# Altium PCB PCB_bad_traced.PcbDoc (part 2 of 5)
Units mm, origin at the board's own origin, x right, y up, seen from the top; angles counter-clockwise.
Board outline 425 x 295 mm, 2 copper layers (Top Layer, Bottom Layer); 484 components, 419 nets, 1569 pads, 847 vias.
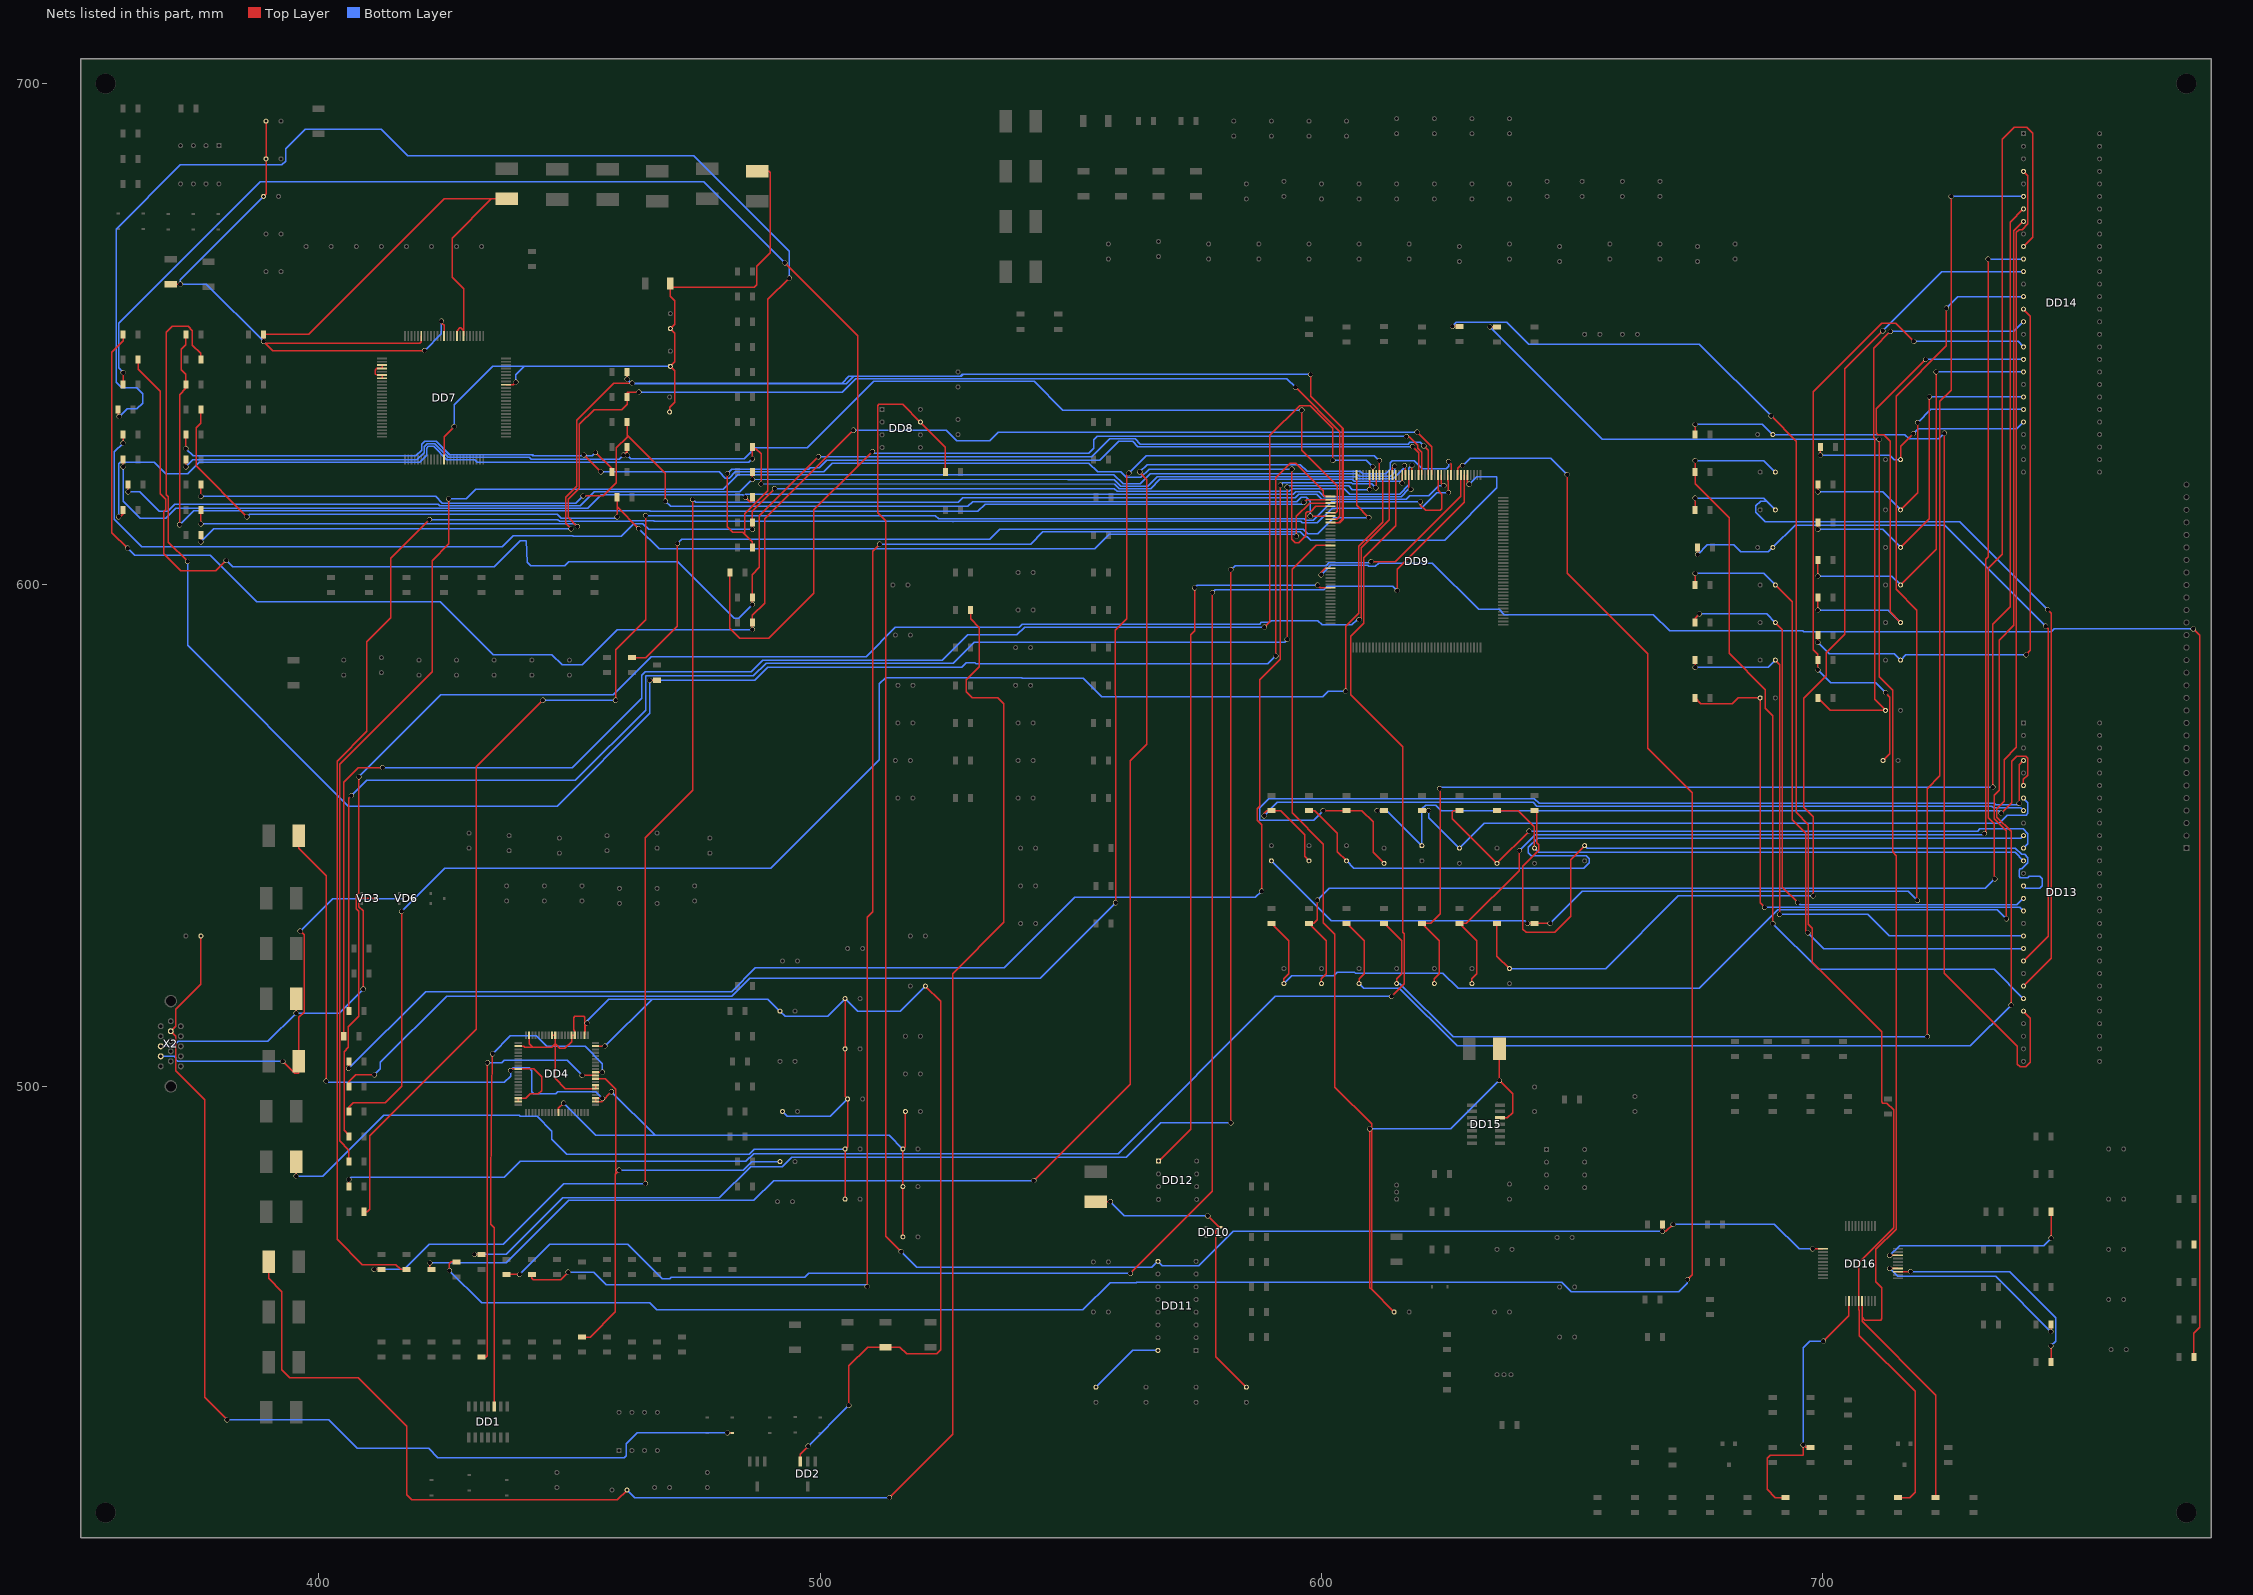
[diagram p2: the nets of this part, all layers, seen from the top]

## Via types
v1: diameter 1, hole 0.9, Top Layer to Bottom Layer, 847 vias

## Nets (pads, with @x,y where several pads share a name; then routed paths per layer and width w, separated by ;. In a path a pad name is that pad's centre, name@x,y a point inside that pad or via, vN(x,y) a via of type N, cw(c..) or ccw(c..) an arc to the next point about the centre after c; other vN are vias at no path point) (continued)
5V_VGA: C172.2 VD10.1 X2.9 | length 210.9
  Top Layer w0.25: C172.2@376.5,530 376.5,520.366 371.5,515.366 371.5,512 X2.9@370.5,511 371.5,510 371.5,503.123 377.241,497.383 377.241,438.023 v1(381.762,433.502) ; v1(481.533,430.911) 481.544,430.9 VD10.1@482.5,430.9
  Bottom Layer w0.25: v1(381.762,433.502) 401.98,433.502 407.695,427.787 421.945,427.787 423.748,425.983 460.959,425.983 461.34,426.364 461.34,428.701 463.55,430.911 v1(481.533,430.911)
5Va: C130.2 DD11.16 | length 15.4
  Bottom Layer w0.25: C130.2@555,440 562.34,447.34 DD11.16@567.38,447.34
5Vb: C128.1 DD10.5 L20.2 | length 61.9
  Top Layer w0.25: L20.2@555,477 v1(557.886,477) ; v1(577.317,474.193) 579.609,471.9 ; DD10.5@580,471.9 579.609,471.9 ; C128.1@585,440 578.871,446.129 578.871,471.162 579.609,471.9
  Bottom Layer w0.25: v1(557.886,477) 560.693,474.193 v1(577.317,474.193)
12MHZ: C158.1 DD9.16 DD15.12 L24.1 | length 245
  Top Layer w0.25: DD9.16@601.8,607.9 598.959,607.9 594.157,603.098 594.157,554.533 600.354,548.335 600.354,532.613 602.64,530.327 602.64,499.872 610.006,492.506 610.006,459.494 ; v1(609.625,491.515) 609.625,459.875 610.006,459.494 ; C158.1@614.5,455 610.006,459.494 ; L24.1@635.5,507.5 v1(635.5,501.201) 638.124,498.577 638.124,494.792 637.062,493.73 DD15.12@635.6,493.73
  Bottom Layer w0.25: v1(609.625,491.515) 625.815,491.515 v1(635.5,501.201)
9883_HS: DD4.30 R14.2 | length 82.7
  Top Layer w0.25: R14.2@432.5,446 433.351,446 433.629,446.278 v1(433.629,504.715) ; v1(452.552,502.183) 452.56,502.175 DD4.30@455.222,502.175
  Bottom Layer w0.25: v1(433.629,504.715) 436.551,504.715 437.045,505.21 449.526,505.21 v1(452.552,502.183)
9883_VS: DD1.10 DD4.31 | length 99.4
  Top Layer w0.25: v1(434.696,506.501) 434.611,506.416 434.325,481.869 434.325,472.509 435.04,471.793 DD1.10@435.04,436.2 ; DD4.31@455.222,502.825 v1(456.59,502.825)
  Bottom Layer w0.25: v1(434.696,506.501) 438.252,510.058 443.382,510.058 445.465,507.975 453.136,507.975 456.59,504.52 v1(456.59,502.825)
+3V3: C1.1 C2.1 C3.1 C4.1 DD4.11 DD4.22 DD4.23 DD4.69 DD4.78 DD4.79 L1.1 | length 246.4
  Top Layer w0.25: L1.1@396,550 396,547.458 401.472,541.985 v1(401.472,501.066) ; v1(438.277,503.149) 438.408,503.149 438.734,503.475 DD4.69@439.778,503.475 442.86,503.475 444.449,501.886 444.449,499.161 443.84,498.551 442.226,498.551 441.3,497.625 DD4.78@439.778,497.625 DD4.79@439.778,496.975 ; DD4.11@447.825,494.778 447.825,495.625 v1(448.843,496.644) ; v1(456.579,497.625) DD4.23@455.222,497.625 DD4.22@455.222,496.975 456.437,496.975 v1(458.394,498.932) ; C1.1@516.5,470 C2.1@516.5,480 C3.1@516.5,487.5 517,488 C4.1@517,495
  Bottom Layer w0.25: v1(401.472,501.066) 401.736,500.802 437.023,500.802 438.277,502.056 v1(438.277,503.149) 438.826,503.697 441.96,503.697 442.534,503.123 442.534,498.901 442.907,498.529 447.275,498.529 447.665,498.918 455.285,498.918 v1(456.579,497.625) ; v1(448.843,496.644) 455.242,490.245 467.081,490.245 ; v1(458.394,498.932) 467.081,490.245 ; C3.1@516.5,487.5 513.755,490.245 467.081,490.245
A3_3V: C57.1 C58.2 C59.2 C60.2 DD7.82 DD7.84 DD7.88 DD7.95 L18.2 R59.1 | length 234.5
  Top Layer w0.25: C57.1@370.5,660 v1(372.415,660) ; R59.1@389,650 R59.1@389,649.986 ; C58.2@389,677.5 389.5,678 C59.2@389.5,685 C60.2@389.5,692.5 ; DD7.95@420.45,649.7 420.45,648.462 420.196,648.208 389.365,648.208 ; v1(421.107,646.76) 390.813,646.76 389.365,648.208 ; v1(424.492,652.632) 424.18,652.632 424.492,652.32 424.492,652.124 424.688,652.124 425,651.812 DD7.88@425,649.7 ; DD7.84@427.6,649.7 427.6,650.748 428.184,651.332 428.316,651.332 428.9,650.748 ; DD7.82@428.9,649.7 428.9,650.748 ; L18.2@437.5,677 434.43,677 ; R59.1@389,649.986 v1(389,648.573) 389.365,648.208 ; R59.1@389,649.986 398.069,649.986 425.083,677 434.43,677 ; 428.9,650.748 428.9,659.109 426.618,661.391 426.618,669.188 434.43,677
  Bottom Layer w0.25: v1(389,648.573) 377.573,660 v1(372.415,660) 372.415,660.915 C58.2@389,677.5 ; v1(421.107,646.76) 424.492,650.146 v1(424.492,652.632)
A3V3: C12.1 C14.1 C26.1 C28.1 C30.1 C31.1 C32.1 C33.1 C34.1 DD2.3 DD4.26 DD4.27 DD4.39 DD4.42 DD4.45 DD4.46 DD4.51 DD4.52 DD4.59 DD4.62 L7.1 | length 433.3
  Top Layer w0.25: L7.1@395.5,485 395.5,482.121 v1(395.503,482.117) ; DD4.62@439.778,508.025 440.895,508.025 441.09,507.83 442.653,507.83 ; DD4.59@441.975,510.222 441.975,508.508 442.653,507.83 ; DD4.52@446.525,510.222 DD4.51@447.175,510.222 447.175,508.473 ; v1(453.533,512.596) 453.303,512.596 DD4.42@453.025,510.222 453.025,513.831 452.872,513.984 451.104,513.984 450.825,513.705 450.825,511.277 451.075,511.026 DD4.45@451.075,510.222 DD4.46@450.425,510.222 450.425,508.935 449.072,507.582 448.056,507.592 447.175,508.473 ; DD4.27@455.222,500.225 DD4.26@455.222,499.575 449.224,499.575 447.175,501.624 447.175,508.473 ; DD4.39@455.222,508.025 v1(457.098,508.025) ; DD2.3@496,425.175 496,426.633 v1(497.611,428.244) ; C34.1@505,477.5 C33.1@505,487.5 505.5,488 C32.1@505.5,497.5 505,498 C31.1@505,507.5 C30.1@505,517.5 ; v1(505.765,436.397) 505.765,444.241 509.524,448 C14.1@513,448 515.874,448 517.24,446.634 523.24,446.634 524.053,447.446 524.053,516.947 C12.1@521,520 ; 442.653,507.83 446.532,507.83 447.175,508.473
  Bottom Layer w0.25: v1(395.503,482.117) 400.839,482.117 412.973,494.251 439.98,494.251 440.234,493.997 443.543,493.997 446.449,491.091 446.449,489.5 449.437,486.512 485.877,486.512 486.865,487.5 C33.1@505,487.5 ; v1(453.533,512.596) 453.533,513.104 457.853,517.423 466.497,517.423 ; v1(457.098,508.025) 466.497,517.423 ; C26.1@492.5,495 493.495,494.005 502.005,494.005 C32.1@505.5,497.5 ; v1(497.611,428.244) v1(505.765,436.397) ; C12.1@521,520 516.01,515.01 507.49,515.01 C30.1@505,517.5 501.494,513.994 493.006,513.994 C28.1@492,515 489.577,517.423 466.497,517.423
ADC1: DD16.34 R222.2 | length 40.4
  Top Layer w0.25: v1(713.334,463.702) 713.336,463.7 DD16.34@714.95,463.7 ; v1(745.49,451.089) 745.5,451.099 R222.2@745.5,452.5
  Bottom Layer w0.25: v1(713.334,463.702) 714.908,462.128 734.451,462.128 v1(745.49,451.089)
ADC2: DD16.33 R224.2 | length 44.5
  Top Layer w0.25: DD16.33@714.95,463.05 v1(717.499,463.05) ; v1(745.49,448.259) 745.5,448.249 R224.2@745.5,445
  Bottom Layer w0.25: v1(717.499,463.05) 737.252,463.05 746.404,453.898 746.404,449.174 v1(745.49,448.259)
ASIC_H: C39.1 L9.2 R108.2 | length 358.4
  Top Layer w0.25: L9.2@390,465 390,461.713 392.684,459.029 392.684,443.445 394.208,441.921 407.912,441.921 417.576,432.257 417.576,418.541 418.592,417.525 459.525,417.525 C39.1@461.5,419.5 ; v1(513.842,418.008) 526.415,430.581 526.415,522.453 536.677,532.714 536.677,576.275 535.432,577.52 530.352,577.52 529.175,578.697 529.175,581.127 531.749,583.701 531.749,591.515 530,593.264 R108.2@530,595
  Bottom Layer w0.25: C39.1@461.5,419.5 462.992,418.008 v1(513.842,418.008)
ASIC_RESET: DD8.7 DD11.9 DD16.11 R118.2 R182.1 | length 385.7
  Top Layer w0.25: v1(516.179,467.03) 513.055,470.154 513.055,612.851 511.48,614.426 511.48,635.762 511.734,636.016 516.484,636.016 DD8.7@520,632.5 525,627.5 R118.2@525,622.5 ; v1(668,471.073) R182.1@668,472.5 ; v1@668.005,471.068 668.706,471.068 v1(670.128,472.491) ; v1(697.941,467.6) DD16.11@700,467.6
  Bottom Layer w0.25: v1(516.179,467.03) 519.278,463.931 566.191,463.931 DD11.9@567.38,465.12 568.259,464.241 575.569,464.241 582.401,471.073 v1(668,471.073) v1@668.005,471.068 ; v1(670.128,472.491) 690.347,472.491 695.237,467.6 v1(697.941,467.6)
ASIC_SCL: DD16.26 R114.2 R221.2 | length 317
  Top Layer w0.25: v1(633.578,651.5) R114.2@635,651.5 ; DD16.26@707.8,457.2 707.8,453.974 ; v1(711.2,629.056) 711.2,581.687 713.883,579.004 713.883,546.795 714.629,546.049 714.629,471.551 710.565,467.487 710.565,461.066 711.787,459.844 711.787,453.644 711.532,453.389 708.386,453.389 707.8,453.974 ; R221.2@722.5,418 722.5,438.443 707.8,453.143 707.8,453.974
  Bottom Layer w0.25: v1(633.578,651.5) 655.97,629.107 711.149,629.107 v1(711.2,629.056)
ASIC_SDA: DD16.25 R115.2 R219.2 | length 309.7
  Top Layer w0.25: v1(626.085,651.586) 626.091,651.58 R115.2@627.5,651.58 ; v1(689.661,633.705) 694.665,628.701 694.665,554.634 697.112,552.187 697.112,532.305 697.906,531.51 697.906,524.723 711.708,510.921 711.708,496.926 711.962,496.672 712.779,496.672 714.125,495.325 714.125,471.834 707.15,464.859 DD16.25@707.15,457.2 707.15,455.498 707.288,455.36 707.288,450.317 718.388,439.217 718.388,419.092 717.296,418 R219.2@715,418
  Bottom Layer w0.25: v1(626.085,651.586) 626.897,652.399 636.949,652.399 641.343,648.005 675.361,648.005 v1(689.661,633.705)
AUDIO_EN: DD16.38 R215.2 | length 40.5
  Top Layer w0.25: v1(713.334,466.293) 713.34,466.3 DD16.38@714.95,466.3 ; v1(745.5,469.758) R215.2@745.5,475
  Bottom Layer w0.25: v1(713.334,466.293) 715.301,468.26 744.003,468.26 v1(745.5,469.758)
AUDIO_MUTE: DD16.22 R212.2 R233.1 | length 55.8
  Top Layer w0.25: R212.2@692.5,418 690.481,418 688.873,419.608 688.873,425.831 689.458,426.415 696.062,426.415 v1(696.062,428.498) 696.56,428 R233.1@697.5,428 ; v1(700.098,449.182) 705.2,454.285 DD16.22@705.2,457.2
  Bottom Layer w0.25: v1(696.062,428.498) 696.062,447.864 697.379,449.182 v1(700.098,449.182)
B_IN: L4.1 VD3.3 X2.3 | length 69.6
  Top Layer w0.25: v1(395.5,514.629) L4.1@395.5,517.5 ; v1(408.889,519.405) 408.889,535 408.025,535.864 408.025,537.413 408.112,537.5 VD3.3@411.25,537.5
  Bottom Layer w0.25: X2.3@368.5,508 370.992,508 371.983,508.991 389.861,508.991 v1(395.5,514.629) 404.114,514.629 v1(408.889,519.405)
B_INA0: DD9.147 R32.2 | length 337.7
  Top Layer w0.25: R32.2@406,480 v1(406,481.432) ; v1(613.969,517.931) 616.509,520.471 616.509,530.489 616.243,530.754 616.243,567.733 605.846,578.131 605.846,589.742 608.432,592.328 608.432,605.447 614.8,611.816 DD9.147@614.8,621.95
  Bottom Layer w0.25: v1(406,481.432) 406.447,481.879 437.048,481.879 440.207,485.038 485.19,485.038 486.765,486.613 559.46,486.613 590.779,517.931 v1(613.969,517.931)
B_INA1: DD9.148 R31.2 | length 338
  Top Layer w0.25: R31.2@406,485 406,487.299 404.165,489.134 404.165,564.261 422.631,582.727 422.631,604.876 425.933,608.178 v1(425.933,617.195) ; DD9.148@614.15,621.95 614.15,623.294 v1(614.578,623.722)
  Bottom Layer w0.25: v1(425.933,617.195) 429.471,617.195 431.376,619.1 480.67,619.1 483.591,622.021 558.597,622.021 560.426,620.192 563.88,620.192 565.865,622.177 607.056,622.177 607.56,621.673 613.816,621.673 614.578,622.435 v1(614.578,623.722)
B_INA2: DD9.149 R30.2 | length 318.3
  Top Layer w0.25: R30.2@406,490 406,490.296 405.054,491.242 405.054,506.933 405.917,507.797 405.917,511.937 408,514.02 408,534.916 407.521,535.395 407.521,538.074 408,538.554 v1(408,561.721) ; v1(607.517,593.09) 607.924,593.496 607.924,607.441 613.5,613.017 DD9.149@613.5,621.95
  Bottom Layer w0.25: v1(408,561.721) 424.383,578.104 458.724,578.104 466.344,585.724 509.161,585.724 514.992,591.555 539.729,591.555 540.35,592.176 587.68,592.176 588.032,592.528 589.592,592.528 589.948,592.883 599.288,592.883 600.148,592.023 606.061,592.023 607.129,593.09 v1(607.517,593.09)
B_INA3: DD9.151 R29.2 | length 312.7
  Top Layer w0.25: R29.2@406,495 406,495.865 406.908,496.773 413.258,496.773 416.535,500.05 v1(416.535,534.899) ; v1(604.825,578.841) 604.825,591.769 607.416,594.36 607.416,607.762 612.2,612.546 DD9.151@612.2,621.95
  Bottom Layer w0.25: v1(416.535,534.899) 425.094,543.458 490.144,543.458 511.835,565.15 511.835,580.263 513.08,581.508 540.182,581.508 540.334,581.355 552.485,581.355 556.158,577.682 600.212,577.682 601.37,578.841 v1(604.825,578.841)
B_INA4: DD9.152 R28.2 | length 310.9
  Top Layer w0.25: R28.2@406,500 406,500.894 407.416,502.31 v1(411.099,502.31) ; v1(558.952,536.626) 558.952,577.952 558.839,578.065 558.839,590.945 561.111,593.217 561.111,621.843 v1(561.594,622.325) ; DD9.152@611.55,621.95 v1(611.55,624.795)
  Bottom Layer w0.25: v1(411.099,502.31) 412.328,503.54 412.328,504.844 425.495,518.011 482.426,518.011 485.978,521.564 543.89,521.564 v1(558.952,536.626) ; v1(561.594,622.325) 565.048,625.78 610.565,625.78 v1(611.55,624.795)
B_INA5: DD9.153 R27.2 | length 303.7
  Top Layer w0.25: v1(405.994,503.58) 406,503.587 R27.2@406,505 ; v1(588.061,538.937) 588.061,552.221 587.186,553.096 587.186,555.346 587.68,555.84 587.68,581.101 591.795,585.216 v1(591.795,619.938) ; v1(610.827,619.371) 610.9,619.445 DD9.153@610.9,621.95
  Bottom Layer w0.25: v1(405.994,503.58) 421.335,518.922 482.422,518.922 487.117,523.617 536.698,523.617 550.774,537.693 586.816,537.693 v1(588.061,538.937) ; v1(591.795,619.938) 592.277,620.42 605.968,620.42 606.227,620.161 610.037,620.161 v1(610.827,619.371)
B_INA6: DD9.154 R26.2 | length 321.9
  Top Layer w0.25: R26.2@405,510 405,560.651 407.924,563.575 v1(412.75,563.575) ; v1(588.62,591.591) 589.694,592.666 589.694,629.816 595.63,635.752 597.723,635.752 602.259,631.215 v1(602.259,624.872) ; DD9.154@610.25,621.95 v1(610.25,623.57)
  Bottom Layer w0.25: v1(412.75,563.575) 450.621,563.575 464.482,577.436 464.482,582.044 465.139,582.701 486.283,582.701 488.569,584.987 524.332,584.987 529.401,590.056 539.238,590.056 540.774,591.591 v1(588.62,591.591) ; v1(602.259,624.872) 608.948,624.872 v1(610.25,623.57)
B_INA7: DD9.155 R25.2 | length 296.9
  Top Layer w0.25: R25.2@406,515 406,557.511 v1(406.502,558.013) ; v1(593.166,589.153) v1(593.166,619.531) ; v1(609.6,619.023) DD9.155@609.6,621.95
  Bottom Layer w0.25: v1(406.502,558.013) 409.575,561.086 451.206,561.086 465.186,575.066 465.186,581.863 465.211,581.889 486.715,581.889 489.255,584.429 526.593,584.429 530.784,588.62 592.633,588.62 v1(593.166,589.153) ; v1(593.166,619.531) 593.42,619.785 605.411,619.785 606.173,619.023 v1(609.6,619.023)
B_INB0: DD9.1 R73.2 R97.2 | length 375.7
  Top Layer w0.25: v1(373.863,604.723) 370.041,608.545 370.041,617.574 369.621,617.993 369.621,650.367 370.84,651.586 373.99,651.586 374.828,650.748 374.828,647.848 376.5,646.176 R73.2@376.5,645 ; v1(466.065,581) R97.2@467.5,581 ; v1(590.906,585.876) 590.906,621.411 593.725,624.23 594.868,624.23 600.316,618.783 600.316,617.982 600.648,617.65 DD9.1@601.8,617.65
  Bottom Layer w0.25: v1(373.863,604.723) 373.863,587.961 405.905,555.918 447.612,555.918 466.065,574.37 v1(466.065,581) 486.969,581 489.61,583.641 528.24,583.641 529.121,584.522 530.879,584.522 531.109,584.292 589.321,584.292 v1(590.906,585.876)
B_INB1: DD9.2 R72.2 R96.2 | length 270.9
  Top Layer w0.25: v1(372.288,612.013) 372.288,637.979 373.5,639.191 R72.2@373.5,640 373.5,642.01 372.567,642.943 372.567,647.014 373.5,647.947 R96.2@373.5,650 ; v1(596.468,616.458) 597.01,617 DD9.2@601.8,617
  Bottom Layer w0.25: v1(372.288,612.013) 375.057,614.783 466.009,614.783 466.105,614.686 531.438,614.686 532.896,616.144 596.154,616.144 v1(596.468,616.458)
B_INB2: DD9.3 R71.2 R95.2 | length 256.6
  Top Layer w0.25: R71.2@376.5,635 376.5,632.303 375.539,631.342 375.539,623.748 v1(385.699,613.588) ; R95.2@459.5,617.5 459.5,615.569 ; v1(459.511,613.588) 459.5,613.599 459.5,615.569 ; v1(463.818,611.251) 459.5,615.569 ; v1(594.995,609.727) 594.995,613.736 597.609,616.35 DD9.3@601.8,616.35
  Bottom Layer w0.25: v1(385.699,613.588) 386.214,614.102 447.611,614.102 448.408,613.305 459.228,613.305 v1(459.511,613.588) ; v1(463.818,611.251) 467.882,607.187 554.787,607.187 557.679,610.079 594.643,610.079 v1(594.995,609.727)
B_INB3: DD9.4 R70.2 R94.2 | length 272.2
  Top Layer w0.25: v1(373.5,627.19) R70.2@373.5,630 ; v1(452.882,625.958) v1(456.303,622.536) ; v1(455.198,626.466) 458.5,623.164 R94.2@458.5,622.5 ; v1(594.116,623.113) 594.116,609.092 594.743,608.465 595.511,608.465 596.878,609.833 596.878,614.353 597.154,614.629 597.814,614.629 598.885,615.7 DD9.4@601.8,615.7
  Bottom Layer w0.25: v1(373.5,627.19) 374.961,625.729 419.397,625.729 420.54,626.872 420.54,628.049 421.132,628.641 423.4,628.641 ; v1(452.882,625.958) v1@452.703,625.779 ; v1(455.198,626.466) 454.511,625.779 v1@452.703,625.779 ; v1(456.303,622.536) 479.892,622.536 481.109,621.319 481.882,621.319 483.099,622.536 500.7,622.536 502.42,624.256 553.618,624.256 555.338,622.536 559.971,622.536 561.061,621.446 563.984,621.446 565.651,623.113 v1(594.116,623.113) ; 423.4,628.641 426.084,625.957 426.147,625.957 ; 423.4,628.641 423.463,628.641 426.147,625.957 ; 426.147,625.957 442.521,625.957 ; 442.521,625.957 442.699,625.779 442.877,625.779 ; 442.521,625.957 442.699,625.957 442.877,625.779 ; 442.877,625.779 v1@452.703,625.779
B_INB4: DD9.6 R69.2 R93.2 | length 263.7
  Top Layer w0.25: v1(373.5,623.57) R69.2@373.5,625 ; v1(460.756,625.907) 461.5,626.651 ; v1(461.5,625.907) 461.5,626.651 ; R93.2@461.5,627.5 461.5,626.651 ; v1(596.062,634.873) 596.062,626.847 603.148,619.76 603.148,614.68 602.868,614.4 DD9.6@601.8,614.4
  Bottom Layer w0.25: v1(373.5,623.57) 374.897,624.967 419.608,624.967 421.044,626.403 421.044,627.541 421.64,628.137 423.164,628.137 425.848,625.453 442.017,625.453 442.392,625.079 459.928,625.079 v1(460.756,625.907) ; v1(461.5,625.907) 462.211,625.196 484.886,625.196 487.02,627.329 497.408,627.329 510.667,640.588 542.694,640.588 548.409,634.873 v1(596.062,634.873)
B_INB5: DD9.7 R68.2 R92.2 | length 253.9
  Top Layer w0.25: v1(376.5,617.652) R68.2@376.5,620 ; v1(452.745,617.753) 456.717,617.753 459.334,620.37 459.334,627.322 461.5,629.488 461.5,629.913 ; R92.2@461.5,632.5 461.5,629.913 ; v1(469.138,616.737) 469.138,622.275 461.5,629.913 ; v1(597.757,613.75) DD9.7@601.8,613.75
  Bottom Layer w0.25: v1(376.5,617.652) 423.301,617.652 424.637,616.316 451.307,616.316 v1(452.745,617.753) ; v1(469.138,616.737) 470.179,615.696 529.488,615.696 530.44,616.648 595.065,616.648 595.964,617.547 596.923,617.547 597.757,616.712 v1(597.757,613.75)
B_INB6: DD9.8 R67.2 R91.2 | length 280.5
  Top Layer w0.25: v1(376.5,612.165) R67.2@376.5,615 ; v1(451.587,611.632) 449.757,613.462 449.757,617.117 451.968,619.328 451.968,632.028 454.914,634.975 460.459,634.975 461.5,636.016 R91.2@461.5,637.5 461.5,638.454 v1(463.88,638.454) ; v1(594.817,639.42) 603.656,630.58 603.656,613.664 603.092,613.1 DD9.8@601.8,613.1
  Bottom Layer w0.25: v1(376.5,612.165) 451.053,612.165 v1(451.587,611.632) ; v1(463.88,638.454) 504.444,638.454 507.107,641.117 593.12,641.117 v1(594.817,639.42)
B_INB7: DD9.9 R66.2 R90.2 | length 351.4
  Top Layer w0.25: R66.2@376.5,610 376.5,608.588 v1(376.504,608.584) ; v1(450.367,611.2) 449.247,612.321 449.247,617.471 451.46,619.683 451.46,632.866 458.851,640.258 v1(462.509,640.258) ; v1(461.5,641.073) R90.2@461.5,642.5 ; v1(597.84,642.01) 597.84,637.667 604.164,631.342 ; DD9.9@601.8,612.45 603.458,612.45 ; 603.458,612.45 604.164,613.156 604.164,631.342 ; 603.458,612.45 603.611,612.45 604.317,613.156 604.317,631.19 604.164,631.342
  Bottom Layer w0.25: v1(376.504,608.584) 379.12,611.2 v1(450.367,611.2) ; v1(461.5,641.073) 462.417,640.156 505.206,640.156 506.671,641.621 ; v1(462.509,640.258) 504.402,640.258 505.765,641.621 506.671,641.621 ; v1(597.84,642.01) 528.557,642.01 ; 506.671,641.621 527.981,641.621 ; 527.981,641.621 528.371,642.01 528.557,642.01 ; 527.981,641.621 528.168,641.621 528.557,642.01
BA0: C117.2 DD14.16 R136.1 | length 119.8
  Top Layer w0.25: R136.1@699,577.5 701.5,575 C117.2@712.5,575 710.311,577.189 710.311,629.287 710.096,629.502 710.096,647.231 v1(713.447,650.582)
  Bottom Layer w0.25: v1(713.447,650.582) 738.082,650.582 DD14.16@740,652.5
BA1: C114.2 DD14.18 R135.1 | length 135.1
  Top Layer w0.25: v1(699.008,583.057) 699,583.065 R135.1@699,585 699,586.181 698.119,587.062 698.119,638.531 711.759,652.17 714.578,652.17 v1(718.16,648.589) ; C114.2@712,565 713.379,566.379 713.379,577.627 v1(712.495,578.51)
  Bottom Layer w0.25: v1(699.008,583.057) 701.599,580.466 710.54,580.466 v1(712.495,578.51) ; v1(718.16,648.589) 738.911,648.589 DD14.18@740,647.5
BA2: C111.2 DD14.15 R134.1 | length 114.8
  Top Layer w0.25: v1(699,588.569) R134.1@699,590 ; DD14.15@740,655 741.401,653.599 741.401,586.943 v1(740.512,586.054)
  Bottom Layer w0.25: v1(699,588.569) 701.311,586.257 714.243,586.257 C111.2@715.5,585 716.554,586.054 v1(740.512,586.054)
BA3: C108.2 DD14.19 R133.1 | length 98.9
  Top Layer w0.25: v1(699,594.995) R133.1@699,597.5 ; C108.2@715.5,592.5 713.384,594.616 713.384,628.701 712.089,629.996 710.946,629.996 710.6,630.342 710.6,635.121 v1(720.479,645)
  Bottom Layer w0.25: v1(699,594.995) 713.005,594.995 C108.2@715.5,592.5 ; v1(720.479,645) DD14.19@740,645
BA4: C105.2 DD14.20 R132.1 | length 83.3
  Top Layer w0.25: v1(699,601.777) R132.1@699,605 ; C105.2@715.5,600 722.579,607.079 v1(722.579,642.5)
  Bottom Layer w0.25: v1(699,601.777) 713.723,601.777 C105.2@715.5,600 ; v1(722.579,642.5) DD14.20@740,642.5
BA5: C102.2 DD14.22 R131.1 | length 70.5
  Top Layer w0.25: v1(699,611.073) R131.1@699,612.5 ; C102.2@715.5,607.5 721.258,613.258 v1(721.258,637.5)
  Bottom Layer w0.25: v1(699,611.073) 711.927,611.073 C102.2@715.5,607.5 ; v1(721.258,637.5) DD14.22@740,637.5
BA6: C99.2 DD14.23 R128.1 | length 60.4
  Top Layer w0.25: v1(699,618.566) R128.1@699,620 ; C99.2@715.5,615 718.912,618.412 v1(718.912,632.399)
  Bottom Layer w0.25: v1(699,618.566) 711.934,618.566 C99.2@715.5,615 ; v1(718.912,632.399) 721.512,635 DD14.23@740,635
BA7: C95.2 DD14.24 R127.1 | length 47.1
  Top Layer w0.25: v1(699.5,625.879) R127.1@699.5,627.5 ; C95.2@715.5,625 715.5,627.641 v1(718.033,630.174)
  Bottom Layer w0.25: v1(699.5,625.879) 713.334,625.879 714.213,625 C95.2@715.5,625 ; v1(718.033,630.174) 719.049,631.19 738.69,631.19 DD14.24@740,632.5
BB0: C91.2 DD13.16 R126.1 | length 108
  Top Layer w0.25: R126.1@674.5,577.5 675.649,576.351 681.939,576.351 683.088,577.5 C91.2@687.5,577.5 687.5,536.577 v1(688.377,535.699)
  Bottom Layer w0.25: v1(688.377,535.699) 739.301,535.699 DD13.16@740,535
BB1: C86.2 DD13.18 R125.1 | length 119.5
  Top Layer w0.25: v1(674.497,583.565) 674.5,583.568 R125.1@674.5,585 ; C86.2@690.5,585 691.388,584.112 v1(691.388,534.314)
  Bottom Layer w0.25: v1(674.497,583.565) 689.065,583.565 C86.2@690.5,585 ; v1(691.388,534.314) 708.939,534.314 713.254,530 DD13.18@740,530
BB2: C82.2 DD13.15 R124.1 | length 121.4
  Top Layer w0.25: R124.1@674.5,592.5 674.5,593.37 v1(675.363,594.233) ; C82.2@690.5,592.5 691.896,591.104 691.896,539.75 v1(694.969,536.677)
  Bottom Layer w0.25: v1(675.363,594.233) 688.767,594.233 C82.2@690.5,592.5 ; v1(694.969,536.677) 695.443,536.203 738.703,536.203 DD13.15@740,537.5
BB3: C78.2 DD13.19 R123.1 | length 135.6
  Top Layer w0.25: R123.1@674.5,600 v1(674.5,602.31) ; C78.2@690.5,600 693.877,596.623 693.877,553.225 696.608,550.495 696.608,531.05 v1(697.027,530.631)
  Bottom Layer w0.25: v1(674.5,602.31) 688.19,602.31 C78.2@690.5,600 ; v1(697.027,530.631) 700.158,527.5 DD13.19@740,527.5
BB4: C76.2 DD13.20 R122.1 | length 151.9
  Top Layer w0.25: R122.1@675,607.5 675,606.074 v1(675.005,606.069) ; DD13.20@740,525 744.931,529.931 744.931,591.287 v1(744.423,591.795)
  Bottom Layer w0.25: v1(675.005,606.069) 676.961,608.025 682.193,608.025 683.616,606.603 689.103,606.603 C76.2@690,607.5 694.462,611.962 724.256,611.962 v1(744.423,591.795)
BB5: C74.2 DD13.22 R121.1 | length 167
  Top Layer w0.25: R121.1@674.5,615 v1(674.5,617.322) ; DD13.22@740,520 745.541,525.541 745.541,594.385 v1(744.83,595.097)
  Bottom Layer w0.25: v1(674.5,617.322) 688.178,617.322 688.788,616.712 ; C74.2@690.5,615 688.788,616.712 ; v1(744.83,595.097) 727.278,612.648 688.518,612.648 686.613,614.553 686.613,615.756 687.569,616.712 688.788,616.712
BB6: C72.2 DD13.23 R120.1 | length 171.9
  Top Layer w0.25: v1(674.5,624.815) R120.1@674.5,622.5 674.5,620.189 681.279,613.41 681.279,586.41 688.543,579.145 688.543,575.462 690.042,573.964 v1(690.042,532.46)
  Bottom Layer w0.25: v1(674.5,624.815) 688.185,624.815 C72.2@690.5,622.5 ; v1(690.042,532.46) 699.16,523.342 734.158,523.342 DD13.23@740,517.5
BB7: C70.2 DD13.24 R119.1 | length 199.3
  Top Layer w0.25: R119.1@674.5,630 v1(674.5,632.054) ; v1(724.23,630.301) 724.23,522.605 738.81,508.025 738.81,504.444 739.318,503.936 740.486,503.936 741.401,504.85 741.401,513.599 DD13.24@740,515
  Bottom Layer w0.25: v1(674.5,632.054) 687.946,632.054 C70.2@690,630 716.352,630 717.22,629.133 723.062,629.133 v1(724.23,630.301)
BL_ON_OFF: R206.2
COAST: C25.2 DD4.29 R18.2 | length 91.9
  Top Layer w0.25: R18.2@452.5,450 454.152,450 459.171,455.019 459.171,482.539 459.236,482.604 ; DD4.29@455.222,501.525 457.2,501.525 459.273,499.452 459.273,498.551 459.236,482.604 ; v1(459.918,483.286) 459.236,482.604
  Bottom Layer w0.25: v1(459.918,483.286) 484.672,483.286 486.386,485 C25.2@492,485
D3_3V: C42.1 C45.2 C47.2 C50.2 DD7.38 DD7.67 L13.2 | length 135.7
  Top Layer w0.25: DD7.38@425,625 425,629.576 v1(426.999,631.575) ; DD7.67@437.35,639.95 438.84,639.95 v1(439.348,640.458) ; C50.2@470,634.5 470,635.481 470.992,636.473 470.992,642.748 C47.2@470.12,643.62 471.018,644.518 471.018,650.222 C45.2@470.12,651.12 471.018,652.018 471.018,656.692 470.12,657.589 C42.1@470.12,659.359 ; C42.1@470.12,660.12 C42.1@470.12,659.359 ; L13.2@487.5,682.5 489.837,682.5 490.093,682.244 490.093,666.293 487.401,663.6 487.401,659.892 486.867,659.359 C42.1@470.12,659.359
  Bottom Layer w0.25: v1(426.999,631.575) 426.999,635.914 434.705,643.62 441.025,643.62 ; v1(439.348,640.458) 439.348,641.943 441.025,643.62 ; C47.2@470.12,643.62 441.025,643.62
D3_V3: DD7.3 DD7.4 DD7.6 DD7.7 | length 5
  Top Layer w0.25: DD7.7@412.65,641.25 DD7.6@412.65,641.9 411.48,641.9 411.302,642.078 411.302,642.874 411.628,643.2 DD7.4@412.65,643.2 DD7.3@412.65,643.85
DE_IN: DD9.159 R98.2 | length 178.4
  Top Layer w0.25: R98.2@462.5,585.5 465.226,585.5 471.526,591.799 v1(471.526,608.279) ; DD9.159@607,621.95 607,615.883 v1(609.448,613.435)
  Bottom Layer w0.25: v1(471.526,608.279) 472.364,609.117 533.857,609.117 535.827,611.087 593.324,611.11 596.378,611.11 597.228,610.26 599.288,610.26 602.463,613.435 v1(609.448,613.435)
FBLK: DD9.23 R189.2 | length 330
  Top Layer w0.25: v1(599.923,602.031) 599.923,602.563 600.71,603.35 DD9.23@601.8,603.35 ; v1(773.862,591.261) 775.157,589.966 775.157,451.931 774,450.774 R189.2@774,446
  Bottom Layer w0.25: v1(599.923,602.031) 601.816,603.924 609.273,603.924 609.453,603.744 610.771,603.744 611.381,604.355 622.098,604.355 631.317,595.135 635.444,595.135 636.499,594.081 666.191,594.081 669.417,590.855 695.935,590.855 696.163,590.626 745.542,590.626 746.177,591.261 v1(773.862,591.261)
FCLK1: DD9.29 DD12.1 | length 144.9
  Top Layer w0.25: DD12.1@567.5,485.08 573.888,491.468 573.888,590.046 574.675,590.833 v1(574.675,599.44) ; v1(599.235,599.958) 599.743,599.45 DD9.29@601.8,599.45
  Bottom Layer w0.25: v1(574.675,599.44) 575.193,599.958 v1(599.235,599.958)
G_IN: L5.1 VD6.3 X2.2 | length 83.3
  Top Layer w0.25: v1(392.862,505.003) 395.199,502.666 396,502.666 L5.1@396,505 396,513.754 397.078,514.833 397.078,530.2 v1(396.316,530.962) ; v1(417.424,537.413) 417.51,537.5 VD6.3@418.75,537.5
  Bottom Layer w0.25: X2.2@368.5,506 371.24,506 371.526,505.714 371.526,505.333 371.856,505.003 v1(392.862,505.003) ; v1(396.316,530.962) 402.768,537.413 v1(417.424,537.413)
G_INA0: DD9.125 R40.2 | length 358.2
  Top Layer w0.25: R40.2@442.5,462.5 442.5,461.772 442.805,461.467 448.234,461.467 v1(449.732,462.966) ; v1(509.397,460.07) 509.397,533.756 510.464,534.822 510.464,606.755 v1(511.861,608.152) ; DD9.125@629.1,621.95 629.1,620.453 v1(629.463,620.09)
  Bottom Layer w0.25: v1(449.732,462.966) 454.868,462.966 457.399,460.435 509.033,460.435 v1(509.397,460.07) ; v1(511.861,608.152) 541.993,608.152 544.424,610.583 594.286,610.583 594.309,610.606 595.716,610.606 596.731,609.591 597.2,609.591 597.826,608.965 624.561,608.965 635,619.404 635,621.613 634.983,621.63 631.002,621.63 v1(629.463,620.09)
G_INA1: DD9.126 R39.2 | length 339
  Top Layer w0.25: R39.2@437.5,462.5 v1(440.08,462.5) ; v1(561.873,462.702) 578.256,479.085 v1(578.256,598.475) ; v1(615.061,598.881) 615.061,603.152 628.45,616.541 DD9.126@628.45,621.95
  Bottom Layer w0.25: v1(440.08,462.5) 446.083,468.503 461.645,468.503 468.527,461.621 470.027,461.621 470.305,461.899 496.926,461.899 497.728,462.702 v1(561.873,462.702) ; v1(578.256,598.475) 578.79,599.008 600.456,599.008 601.193,599.745 614.197,599.745 v1(615.061,598.881)
G_INA2: DD9.127 R38.2 | length 329.7
  Top Layer w0.25: v1(431.063,466.496) 431.067,466.5 R38.2@432.5,466.5 ; v1(581.939,492.735) v1(581.939,603.072) ; v1(609.879,604.647) 614.719,604.647 627.8,617.728 DD9.127@627.8,621.95
  Bottom Layer w0.25: v1(431.063,466.496) 437.413,466.496 448.682,477.765 479.924,477.765 486.181,484.022 492.455,484.022 494.335,485.902 561.086,485.902 567.919,492.735 v1(581.939,492.735) ; v1(581.939,603.072) 582.752,603.885 600.913,603.885 601.457,604.428 609.661,604.428 v1(609.879,604.647)
G_INA3: DD9.128 R37.2 | length 454.2
  Top Layer w0.25: v1(426.085,463.271) 426.085,464.619 426.466,465 R37.2@427.5,465 ; DD9.128@627.15,621.95 627.15,623.316 627.658,623.824 v1(628.142,623.824) ; v1(648.97,622.021) 648.97,602.374 665.058,586.286 665.058,567.452 673.989,558.521 673.989,462.474 v1(672.973,461.458)
  Bottom Layer w0.25: v1(426.085,463.271) 432.551,456.805 466.028,456.805 467.385,455.447 552.425,455.447 557.823,460.846 563.033,460.846 563.12,460.934 647.954,460.934 649.859,459.029 671.246,459.029 672.973,460.756 v1(672.973,461.458) ; v1(628.142,623.824) 629.625,625.307 645.683,625.307 v1(648.97,622.021)
G_INA4: DD9.130 R36.2 | length 349.5
  Top Layer w0.25: v1(422.199,464.82) 422.199,463.5 R36.2@422.5,463.5 ; v1(542.646,481.203) 561.848,500.405 561.848,564.947 565.175,568.274 565.175,621.03 563.753,622.452 v1(563.753,622.554) ; v1(625.348,624.586) 625.85,624.084 DD9.130@625.85,621.95
  Bottom Layer w0.25: v1(422.199,464.82) 437.439,464.82 449.879,477.261 486.796,477.261 490.738,481.203 v1(542.646,481.203) ; v1(563.753,622.554) 565.201,624.002 595.808,624.002 597.129,622.681 607.767,622.681 608.271,622.177 612.787,622.177 613.699,623.089 613.699,624.332 614.131,624.764 618.515,624.764 620.09,623.189 624.84,623.189 625.348,623.697 v1(625.348,624.586)
G_INA5: DD9.131 R35.2 | length 377.2
  Top Layer w0.25: R35.2@417.5,463.5 416.382,463.5 415.418,464.464 408.737,464.464 403.657,469.544 403.657,564.896 409.55,570.789 409.55,588.67 414.325,593.446 414.325,605.307 v1(422.072,613.054) ; DD9.131@625.2,621.95 625.2,620.777 625.287,620.69 v1(625.287,618.424)
  Bottom Layer w0.25: v1(422.072,613.054) 447.65,613.054 448.031,612.673 462.302,612.673 462.42,612.792 466.777,612.792 466.896,612.673 526.342,612.673 526.441,612.574 526.541,612.673 595.828,612.673 596.138,612.363 599.144,612.363 602.122,615.34 619.882,615.34 622.965,618.424 v1(625.287,618.424)
G_INA6: DD9.133 R34.2 | length 357.6
  Top Layer w0.25: v1(411.074,463.5) R34.2@412.5,463.5 ; v1(465.176,480.619) 465.176,549.605 474.599,559.029 v1(474.599,617.093) ; DD9.133@623.9,621.95 623.9,620.319 v1(624.408,619.811)
  Bottom Layer w0.25: v1(411.074,463.5) 417.043,463.5 422.046,468.503 436.778,468.503 448.894,480.619 v1(465.176,480.619) ; v1(474.599,617.093) 475.234,616.458 527.507,616.458 528.447,617.398 594.792,617.398 595.452,618.058 599.084,618.058 600.016,617.126 616.939,617.126 617.58,617.767 621.348,617.767 623.392,619.811 v1(624.408,619.811)
G_INA7: DD9.134 R33.2 | length 340
  Top Layer w0.25: R33.2@409,475 409,474.98 409.677,474.98 410.185,475.488 410.185,490.147 431.47,511.432 431.47,563.778 v1(444.703,577.012) ; v1(459.207,577.012) 459.207,587.096 465.226,593.115 v1(465.226,613.816) ; v1(619.735,616.56) 619.735,615.899 620.776,614.858 623.672,614.858 624.002,615.188 624.002,618.119 623.25,618.871 DD9.134@623.25,621.95
  Bottom Layer w0.25: v1(444.703,577.012) v1(459.207,577.012) ; v1(465.226,613.816) 523.011,613.816 523.646,613.181 596.56,613.181 596.875,612.867 598.364,612.867 602.056,616.56 v1(619.735,616.56)
G_INB0: DD9.136 R81.2 R89.2 | length 353.9
  Top Layer w0.25: R89.2@361,650 361,648.691 358.775,646.466 358.775,610.438 v1(361.874,607.339) ; v1(486.512,591.083) 486.5,591.095 R81.2@486.5,592.5 486.5,593.954 488.95,596.404 488.95,613.181 v1(506.628,630.86) ; v1(619.074,630.479) 621.95,627.603 DD9.136@621.95,621.95
  Bottom Layer w0.25: v1(361.874,607.339) 363.296,605.917 378.38,605.917 387.626,596.671 424.256,596.671 434.797,586.13 446.532,586.13 448.564,584.098 452.526,584.098 459.511,591.083 v1(486.512,591.083) ; v1(506.628,630.86) 525.196,630.86 527.304,628.752 533.788,628.752 535.515,630.479 v1(619.074,630.479)
G_INB1: DD9.137 R80.2 R88.2 | length 338.4
  Top Layer w0.25: R88.2@364,645 364,643.034 368.427,638.607 368.427,618.228 369.536,617.118 369.536,615.027 369.113,614.604 369.113,606.196 372.491,602.818 379.425,602.818 v1(381.533,604.926) ; v1(486.5,596.062) R80.2@486.5,597.5 486.5,602.082 487.909,603.49 487.909,613.816 v1(499.669,625.577) ; v1(620.395,627.761) 621.3,626.856 DD9.137@621.3,621.95
  Bottom Layer w0.25: v1(381.533,604.926) 382.829,603.631 435.026,603.631 440.248,608.853 441.35,608.853 441.62,604.52 442.294,603.846 449.061,603.846 449.864,604.648 471.564,604.648 482.868,593.344 483.782,593.344 v1(486.5,596.062) ; v1(499.669,625.577) 554.203,625.577 557.766,629.14 562.827,629.14 563.85,628.117 617.281,628.117 617.652,628.488 619.668,628.488 v1(620.395,627.761)
G_INB2: DD9.139 R79.2 R87.2 | length 394.3
  Top Layer w0.25: R87.2@361,640 v1(361,642.376) ; R79.2@482,602.5 482,591.353 483.997,589.356 489.712,589.356 498.754,598.399 498.754,614.959 507.517,623.722 ; v1(492.963,664.261) 507.517,649.707 507.517,623.722 ; v1(510.413,626.618) 507.517,623.722 ; v1(616.915,629.59) 617.529,629.59 619.231,627.888 619.231,627.274 620,626.505 DD9.139@620,621.95
  Bottom Layer w0.25: v1(361,642.376) 360.096,643.28 360.096,652.17 388.366,680.441 476.783,680.441 v1(492.963,664.261) ; v1(510.413,626.618) 510.743,626.288 553.618,626.288 554.558,627.228 554.558,629.006 555.244,629.691 616.814,629.691 v1(616.915,629.59)
G_INB3: DD9.140 R78.2 R86.2 | length 424
  Top Layer w0.25: R86.2@360,635 360,633.8 v1(360.223,633.578) ; v1(481.508,622.198) 481.508,611.632 482.6,610.54 484.556,610.54 485.013,610.083 ; R78.2@486.5,607.5 486.5,608.584 485.013,610.071 485.013,610.083 ; v1(493.852,661.213) 489.61,656.971 489.61,618.769 485.013,614.172 485.013,610.083 ; v1(618.16,627.609) 619.35,626.418 DD9.140@619.35,621.95
  Bottom Layer w0.25: v1(360.223,633.578) 361.772,635.127 363.728,635.127 364.896,636.295 364.896,638.175 363.728,639.343 360.68,639.343 359.588,640.436 359.588,670.941 372.44,683.793 392.684,683.793 393.395,684.505 393.395,686.994 397.281,690.88 412.471,690.88 417.779,685.571 474.853,685.571 493.852,666.572 v1(493.852,661.213) ; v1(481.508,622.198) 482.371,623.062 497.713,623.062 498.069,623.418 499.872,623.418 501.345,624.891 555.805,624.891 559.551,628.636 562.323,628.636 563.401,627.558 618.109,627.558 v1(618.16,627.609)
G_INB4: DD9.142 R77.2 R85.2 | length 293.8
  Top Layer w0.25: v1(361,628.31) R85.2@361,630 ; v1(486.512,611.073) 486.5,611.085 R77.2@486.5,612.5 486.5,614.745 v1(490.957,619.201) ; DD9.142@618.05,621.95 v1(618.05,623.875)
  Bottom Layer w0.25: v1(361,628.31) 359.232,626.542 359.232,613.156 364.719,607.67 436.654,607.67 438.846,609.862 450.708,609.862 450.807,609.762 460.313,609.762 462.813,612.263 464.646,612.263 465.836,611.073 v1(486.512,611.073) ; v1(490.957,619.201) 558.674,619.201 559.223,618.652 593.596,618.652 594.176,619.232 604.491,619.232 605.589,618.134 615.61,618.134 617.423,619.948 617.423,623.248 v1(618.05,623.875)
G_INB5: DD9.143 R76.2 R84.2 | length 276.2
  Top Layer w0.25: R84.2@361,625 361,623.57 v1(361.01,623.56) ; v1(485.117,617.456) 485.787,616.786 485.996,616.577 486.5,616.577 R76.2@486.5,617.5 ; DD9.143@617.4,621.95 617.4,619.478 v1(617.804,619.074)
  Bottom Layer w0.25: v1(361.01,623.56) 361.01,616.687 364.374,613.322 369.512,613.322 371.476,615.287 453.664,615.287 456.349,617.972 484.601,617.972 v1(485.117,617.456) 485.117,618.134 594.385,618.134 594.868,618.617 599.542,618.617 600.528,617.63 615.899,617.63 617.343,619.074 v1(617.804,619.074)
G_INB6: DD9.144 R75.2 R83.2 | length 266.6
  Top Layer w0.25: v1(362.001,618.566) R83.2@362,620 ; v1(486.5,621.073) R75.2@486.5,622.5 ; v1(616.548,623.787) 616.75,623.586 DD9.144@616.75,621.95
  Bottom Layer w0.25: v1(362.001,618.566) 364.268,618.566 368.154,614.68 369.861,614.68 371.258,616.077 423.873,616.077 424.138,615.812 452.165,615.812 454.919,618.566 483.993,618.566 v1(486.5,621.073) 549.386,620.945 558.692,620.945 559.961,619.676 565.326,619.676 567.234,621.584 606.936,621.584 607.351,621.169 614.299,621.169 616.548,623.418 v1(616.548,623.787)
G_INB7: DD9.145 R74.2 R82.2 | length 286.1
  Top Layer w0.25: v1(360.121,613.562) 360.39,613.562 361,614.172 R82.2@361,615 ; v1(486.5,625.17) R74.2@486.5,627.202 ; R74.2@486.5,627.5 R74.2@486.5,627.202 ; v1(488.239,620.141) 488.239,626.135 487.172,627.202 R74.2@486.5,627.202 ; DD9.145@616.1,621.95 616.1,620.321 v1(616.102,620.319)
  Bottom Layer w0.25: v1(360.121,613.562) 360.121,624.154 360.426,624.459 367.208,624.459 369.468,622.198 373.888,622.198 376.149,624.459 420.151,624.459 421.548,625.856 421.548,627.278 421.894,627.624 422.91,627.624 425.585,624.949 431.14,624.949 431.63,624.459 485.789,624.459 v1(486.5,625.17) ; v1(488.239,620.141) 488.747,620.141 558.767,620.116 559.711,619.172 565.909,619.172 567.779,621.042 606.171,621.042 606.548,620.665 615.756,620.665 v1(616.102,620.319)
GA0: C126.2 DD14.8 R152.1 | length 310
  Top Layer w0.25: R152.1@590,532.5 593.496,529.004 593.496,522.478 592.5,521.482 C126.2@592.5,520.5 ; v1(736.6,533.4) 736.6,550.997 734.176,553.422 734.176,558.067 735.13,559.022 735.13,589.008 738.107,591.985 738.107,670.607 DD14.8@740,672.5
  Bottom Layer w0.25: C126.2@592.5,520.5 594.046,522.046 602.412,522.046 603.123,522.757 606.628,522.757 606.781,522.605 624.154,522.605 627.228,519.532 675.335,519.532 690.997,535.193 734.807,535.193 v1(736.6,533.4)
GA1: C124.2 DD14.10 R151.1 | length 336.8
  Top Layer w0.25: v1(599.161,537.134) 599.161,533.237 598.424,532.5 R151.1@597.5,532.5 600.989,529.011 600.989,522.478 600,521.489 C124.2@600,520.5 ; v1(734.289,541.401) 734.162,541.528 734.162,552.424 732.997,553.589 732.997,603.38 735.736,606.12 735.736,688.848 738.2,691.312 740.664,691.312 741.887,690.089 741.887,669.387 DD14.10@740,667.5
  Bottom Layer w0.25: v1(599.161,537.134) 601.523,539.496 732.384,539.496 v1(734.289,541.401)
GA2: C122.2 DD14.4 R150.1 | length 323.1
  Top Layer w0.25: R150.1@605,532.5 608.482,529.018 608.482,522.478 607.5,521.496 C122.2@607.5,520.5 ; v1(737.54,516.23) 737.54,550.86 734.68,553.72 734.68,555.406 736.168,556.895 736.168,565.175 738.611,567.618 738.611,670.386 739.115,670.89 739.724,670.89 740.879,672.045 740.879,681.621 DD14.4@740,682.5
  Bottom Layer w0.25: C122.2@607.5,520.5 608.379,519.621 615.548,519.621 627.067,508.102 729.412,508.102 v1(737.54,516.23)
GA3: C120.2 DD14.6 R149.1 | length 308.1
  Top Layer w0.25: R149.1@612.5,532.5 616.001,528.999 616.001,522.478 615,521.477 C120.2@615,520.5 ; v1(720.827,509.905) 720.827,559.41 723.341,561.924 723.341,636.626 725.576,638.861 v1(725.576,677.52)
  Bottom Layer w0.25: C120.2@615,520.5 615.617,520.5 626.262,509.854 683.328,509.905 v1(720.827,509.905) ; v1(725.576,677.52) 725.596,677.5 DD14.6@740,677.5
GA4: C118.2 DD14.7 R148.1 | length 271.7
  Top Layer w0.25: C118.2@622.5,520.5 622.5,521.484 623.494,522.478 623.494,529.006 R148.1@620,532.5 621.792,532.5 623.712,534.42 623.712,559.216 v1(623.545,559.384) ; v1(733.882,559.664) 733.882,592.176 737.387,595.681 737.387,672.387 DD14.7@740,675
  Bottom Layer w0.25: v1(623.545,559.384) 623.824,559.664 v1(733.882,559.664)
GA5: C115.2 DD14.11 R147.1 | length 250.3
  Top Layer w0.25: C115.2@630,520.5 630,521.491 630.987,522.478 630.987,529.013 R147.1@627.5,532.5 628.904,532.5 639.445,543.041 v1(639.445,547.04) ; v1(732.206,550.393) 732.485,550.672 732.485,605.155 732.968,605.638 v1(732.968,665)
  Bottom Layer w0.25: v1(639.445,547.04) 642.62,550.215 732.028,550.215 v1(732.206,550.393) ; v1(732.968,665) DD14.11@740,665
GA6: C112.2 DD14.12 R146.1 | length 229.6
  Top Layer w0.25: R146.1@635,532.5 635,526 C112.2@637.5,523.5 ; v1(698.068,537.997) 698.068,553.771 696.189,555.65 696.189,577.444 700.659,581.914 700.659,586.461 704.367,590.169 704.367,643.128 v1(711.937,650.697)
  Bottom Layer w0.25: C112.2@637.5,523.5 656.698,523.5 671.195,537.997 v1(698.068,537.997) ; v1(711.937,650.697) 723.739,662.5 DD14.12@740,662.5
GA7: C109.2 DD14.14 R145.1 | length 277.8
  Top Layer w0.25: v1(641.071,532.511) 641.082,532.5 R145.1@642.5,532.5 v1(645.617,532.5) ; v1(718.82,537.083) 718.718,537.185 718.718,594.995 714.604,599.11 714.604,637.667 724.611,647.675 v1(724.611,655.218)
  Bottom Layer w0.25: C109.2@590,545 601.984,533.016 640.565,533.016 v1(641.071,532.511) ; v1(645.617,532.5) 652.004,538.886 717.017,538.886 v1(718.82,537.083) ; v1(724.611,655.218) 726.893,657.5 DD14.14@740,657.5
GB0: C106.2 DD13.8 R144.1 | length 169.6
  Top Layer w0.25: v1(588.569,553.974) 588.569,554.482 589.087,555 R144.1@590,555 591.856,555 596.621,550.235 596.621,545.879 C106.2@597.5,545
  Bottom Layer w0.25: v1(588.569,553.974) 591.22,556.626 642.221,556.626 642.943,555.904 733.698,555.904 734.045,555.557 739.443,555.557 DD13.8@740,555
GB1: C103.2 DD13.10 R143.1 | length 177.4
  Top Layer w0.25: R143.1@597.5,555 598.643,555 603.154,550.488 603.154,546.846 C103.2@605,545
  Bottom Layer w0.25: C103.2@605,545 606.465,543.535 652.348,543.535 653.39,544.576 653.39,545.389 652.78,545.998 641.883,545.998 641.274,546.608 641.274,547.649 643.128,549.504 739.504,549.504 DD13.10@740,550
GB2: C100.2 DD13.4 R142.1 | length 197.6
  Top Layer w0.25: v1(600.314,555) R142.1@605,555 608.025,555 610.286,552.739 610.286,546.714 C100.2@612.5,544.5 ; v1(739.115,556.438) 739.115,564.115 DD13.4@740,565
  Bottom Layer w0.25: v1(600.314,555) 598.409,553.095 587.709,553.095 587.69,553.114 587.69,555.559 589.526,557.395 639.686,557.395 639.69,557.399 642.456,557.399 643.417,556.438 734.202,556.438 734.443,556.196 738.873,556.196 v1(739.115,556.438)
GB3: C96.2 DD13.6 R141.1 | length 158
  Top Layer w0.25: v1(611.073,554.99) 611.083,555 R141.1@612.5,555 ; v1(735.559,554.507) 737.641,556.59 737.641,564.896 738.632,565.887 740.41,565.887 740.879,565.418 740.879,562.102 740,561.223 DD13.6@740,560
  Bottom Layer w0.25: v1(611.073,554.99) 613.01,554.99 C96.2@620,548 620,555.342 620.776,556.118 622.823,556.118 623.926,555.015 735.051,555.015 v1(735.559,554.507)
GB4: C92.2 DD13.7 R140.1 | length 131.1
  Top Layer w0.25: R140.1@620,555 v1(621.386,555)
  Bottom Layer w0.25: v1(621.386,555) 621.386,553.614 C92.2@627.5,547.5 632.501,552.501 735.183,552.501 736.803,554.121 740.532,554.121 740.893,554.482 740.893,556.607 DD13.7@740,557.5
GB5: C87.2 DD13.11 R139.1 | length 127.9
  Top Layer w0.25: R139.1@627.5,555 626.349,555 626.085,554.736 626.085,553.415 C87.2@635,544.5 v1(641.401,550.901)
  Bottom Layer w0.25: v1(641.401,550.901) 730.874,550.901 731.317,551.343 739.968,551.343 740.893,550.418 740.893,548.393 DD13.11@740,547.5
GB6: C83.2 DD13.12 R138.1 | length 111.7
  Top Layer w0.25: R138.1@635,555 639.242,555 642.437,551.805 642.437,547.875 642.5,547.875 C83.2@642.5,547.5
  Bottom Layer w0.25: C83.2@642.5,547.5 643.316,546.684 738.316,546.684 DD13.12@740,545
GB7: C79.2 DD13.14 R137.1 | length 156.5
  Top Layer w0.25: R137.1@642.5,555 642.944,555 642.944,548.637 643.379,548.202 643.379,547.116 640.182,543.919 640.182,531.368 640.817,530.733 646.532,530.733 649.732,533.933 649.732,545.232 C79.2@652.5,548
  Bottom Layer w0.25: C79.2@652.5,548 652.978,547.522 738.378,547.522 739.648,546.252 740.232,546.252 740.893,545.592 740.893,544.576 739.699,543.382 739.394,543.382 739.115,543.103 739.115,541.9 739.394,541.621 740.867,541.621 741.181,541.934 743.204,541.934 743.712,541.426 743.712,540.055 743.204,539.547 740.453,539.547 DD13.14@740,540